# Allegro board RPI_NRF24L01.brd
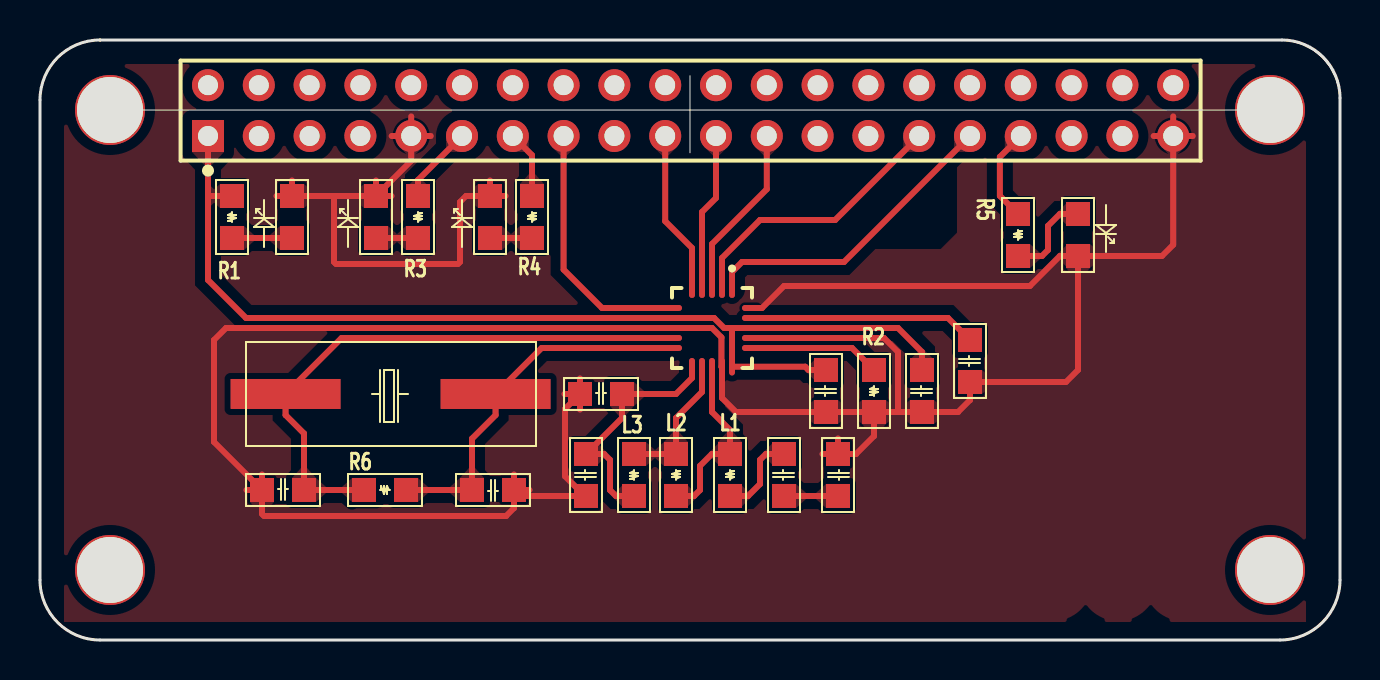
[diagram p0: board, top side]
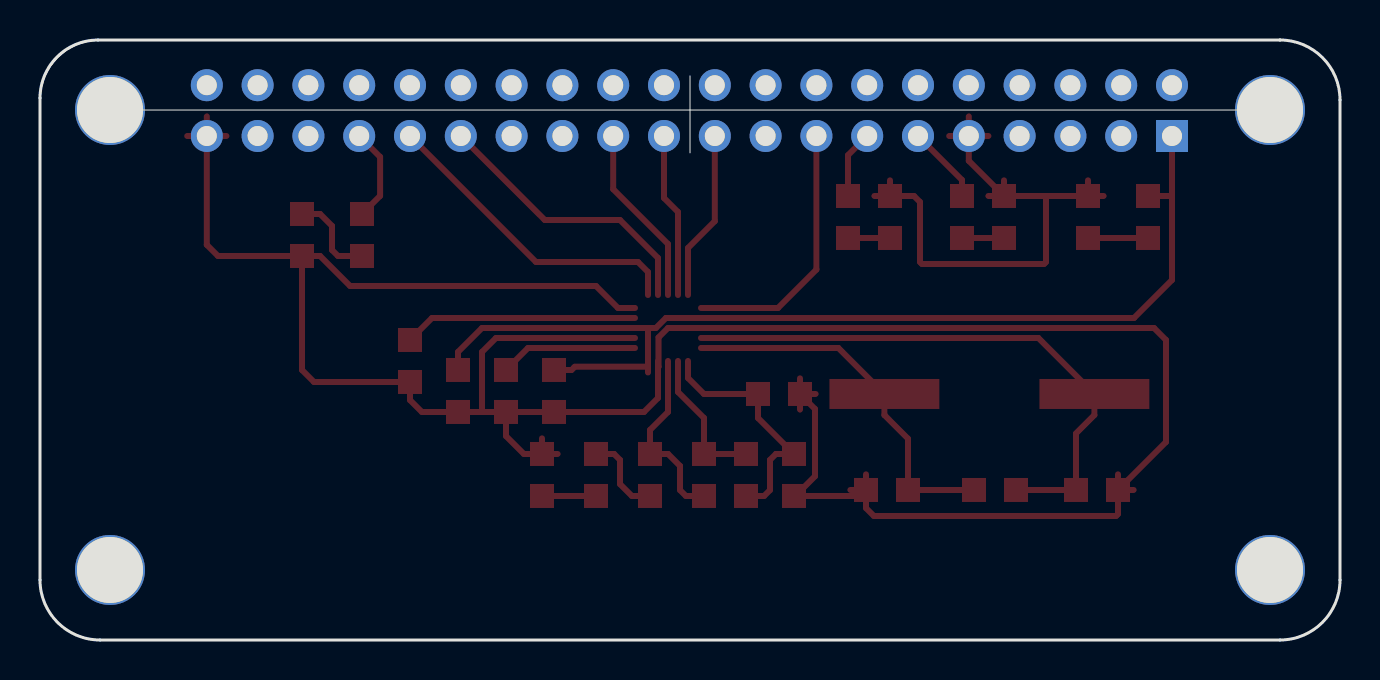
[diagram p1: board, bottom side, seen from below]

Outline 65 x 30 mm; copper layers: TOP, BOTTOM. Coordinates in mm from the lower left corner of the outline.
Outline path: 0,27 0.06,27.59 0.23,28.15 0.51,28.67 0.88,29.12 1.33,29.5 1.85,29.77 2.41,29.94 3,30 ; 0,27 arc(0.88,29.12) 3,30 ; 0,27 0,3 ; 0,27 0,3 ; 3,30 arc(3,30) 3.01,30 62.1,30 arc(64.15,29.15) 65,27.1 65,3 arc(64.12,0.88) 62,0 ; 3,30 62,30 62.58,29.94 63.15,29.77 63.66,29.49 64.12,29.12 64.49,28.67 64.77,28.15 64.94,27.59 65,27 65,3 64.94,2.41 64.77,1.85 64.49,1.33 64.12,0.88 63.66,0.51 63.15,0.23 62.58,0.06 62,0 ; 0,3 0.06,2.42 0.23,1.85 0.51,1.33 0.88,0.88 1.33,0.51 1.85,0.23 2.41,0.06 3,0 62,0 ; 0,3 arc(0.88,0.88) 3,0 62,0 ; 3.5,26.5 61.5,26.5 ; 32.5,28.21 32.5,24.36 ; 2.01,26.65 2.07,26.06 2.34,25.55 2.8,25.18 3.36,25.01 3.94,25.07 4.45,25.34 4.82,25.8 4.99,26.36 4.93,26.94 4.66,27.46 4.2,27.83 3.64,27.99 3.06,27.94 2.55,27.66 2.18,27.21 2.01,26.65 ; 2.01,3.65 2.07,3.06 2.34,2.55 2.8,2.18 3.36,2.01 3.94,2.07 4.45,2.34 4.82,2.8 4.99,3.36 4.93,3.94 4.66,4.46 4.2,4.83 3.64,4.99 3.06,4.94 2.55,4.66 2.18,4.21 2.01,3.65 ; 60.01,26.64 60.06,26.06 60.34,25.55 60.79,25.18 61.35,25.01 61.94,25.07 62.45,25.34 62.82,25.8 62.99,26.36 62.93,26.94 62.66,27.45 62.2,27.82 61.64,27.99 61.06,27.93 60.54,27.66 60.17,27.2 60.01,26.64 ; 60.01,3.64 60.06,3.06 60.34,2.55 60.79,2.18 61.35,2.01 61.94,2.07 62.45,2.34 62.82,2.8 62.99,3.36 62.93,3.94 62.66,4.45 62.2,4.82 61.64,4.99 61.06,4.93 60.54,4.66 60.17,4.2 60.01,3.64

## Design rules (mm)
constraint set DEFAULT: min track width 0.3

## Placement (name value [footprint] x y rotation side)
C1  10nF  [CAP_SMD_0805]  44.1 13.5 270 top
C2  10nF  [CAP_SMD_0805]  39.3 13.5 270 top
C3  33nF  [CAP_SMD_0805]  46.5 15 270 top
C4  1.5pF  [CAP_SMD_0805]  37.2 9.3 270 top
C5  1pF  [CAP_SMD_0805]  39.9 7.2 90 top
C6  2.2nF  [CAP_SMD_0805]  29.1 12.3 180 top
C7  4.7pF  [CAP_SMD_0805]  27.3 9.3 270 top
C8  22pF  [CAP_SMD_0805]  13.2 7.5 180 top
C9  22pF  [CAP_SMD_0805]  21.6 7.5 0 top
D1  LED  [LED_SMD_0805]  12.6 22.2 270 top
D2  LED  [LED_SMD_0805]  51.9 19.2 90 top
D3  LED  [LED_SMD_0805]  22.5 22.2 270 top
D4  LED  [LED_SMD_0805]  16.8 22.2 270 top
J1  RPI_HEADER  [J2_40_254]  8.4 25.2 0 top
L1  3.9nH  [RES_SMD_0805]  34.5 9.3 270 top
L2  8.2nH  [RES_SMD_0805]  31.8 9.3 270 top
L3  2.7nH  [RES_SMD_0805]  29.7 7.2 90 top
NOREF  -  [unnamed]  3.5 26.5 0 top
NOREF#2  -  [unnamed]  61.5 3.5 0 top
NOREF#3  -  [unnamed]  61.5 26.5 0 top
NOREF#4  -  [unnamed]  3.5 3.5 0 top
R1  330R  [RES_SMD_0805]  9.6 20.1 90 top
R2  22K  [RES_SMD_0805]  41.7 11.4 90 top
R3  330R  [RES_SMD_0805]  18.9 22.2 270 top
R4  330R  [RES_SMD_0805]  24.6 22.2 270 top
R5  330R  [RES_SMD_0805]  48.9 21.3 270 top
R6  1M  [RES_SMD_0805]  16.2 7.5 0 top
U1  nRF24L01  [QFN20_4X4]  33.6 15.6 270 top
Y1  16MHz  [CRYSTAL_HC_49]  16.2 12.3 0 top

## Library data of the parts
C1-C9 = CAPACITOR NON-POL
D1-D4 = LED
J1 = RPI_HEADER
L1-L3 = INDUCTOR
R1-R6 = R
U1 = nRF24L01
Y1 = CRYSTAL

## Footprints (pads in the part's own frame, mm; a bottom-side part is the same pattern mirrored in y, then rotated)
CAP_SMD_0805
  rect 1.2x1.2 smd: 1(0,0) 2(2.1,0)
CRYSTAL_HC_49
  rect 5.5x1.5 smd: 1(-3.92,0) 2(6.58,0)
J2_40_254
  rect 1.6x1.6 hole 1: 1(0,0)
  round 1.6 hole 1: 2(0,2.54) 3(2.54,0) 4(2.54,2.54) 5(5.08,0) 6(5.08,2.54) 7(7.62,0) 8(7.62,2.54) 9(10.16,0) 10(10.16,2.54) 11(12.7,0) 12(12.7,2.54) 13(15.24,0) 14(15.24,2.54) 15(17.78,0) 16(17.78,2.54) 17(20.32,0) 18(20.32,2.54) 19(22.86,0) 20(22.86,2.54) 21(25.4,0) 22(25.4,2.54) 23(27.94,0) 24(27.94,2.54) 25(30.48,0) 26(30.48,2.54) 27(33.02,0) 28(33.02,2.54) 29(35.56,0) 30(35.56,2.54) 31(38.1,0) 32(38.1,2.54) 33(40.64,0) 34(40.64,2.54) 35(43.18,0) 36(43.18,2.54) 37(45.72,0) 38(45.72,2.54) 39(48.26,0) 40(48.26,2.54)
LED_SMD_0805
  rect 1.2x1.2 smd: 1(0,0) 2(2.1,0)
QFN20_4X4
  oval 0.875x0.3 smd: 1(-1.938,1) 2(-1.938,0.5) 3(-1.938,0) 4(-1.938,-0.5) 5(-1.938,-1) 11(1.938,-1) 12(1.938,-0.5) 13(1.938,0) 14(1.938,0.5) 15(1.938,1)
  oval 0.3x0.875 smd: 6(-1,-1.938) 7(-0.5,-1.938) 8(0,-1.938) 9(0.5,-1.938) 10(1,-1.938) 16(1,1.938) 17(0.5,1.938) 18(0,1.938) 19(-0.5,1.938) 20(-1,1.938)
RES_SMD_0805
  rect 1.2x1.2 smd: 1(0,0) 2(2.1,0)
unnamed
  round 3.5 hole 3.3: (0,0)

## Nets
3V3: C1.1 C2.1 J1.1 R1.2 U1.7 U1.15 U1.18
GND: C1.2 C2.2 C3.2 C5.2 C6.2 C7.2 C8.2 C9.2 D1.1(CATHODE) D2.1(CATHODE) D3.1(CATHODE) D4.1(CATHODE) J1.9 J1.39 R2.1 U1.8 U1.14 U1.17 U1.20
ANTENA: C4.2 C5.1
CE: J1.31 U1.1
CSN: J1.29 U1.2
IRQ: J1.15 U1.6
LED1: J1.11 R3.1
LED2: J1.13 R4.1
LED3: J1.33 R5.1
MISO: J1.19 U1.5
MOSI: J1.21(IO9/SPI_MISO) U1.4
SCK: J1.23 U1.3
N00576: R2.2 U1.16
N00683: C3.1 U1.19
N00965: L1.1 L2.2 U1.13
N00979: L2.1 L3.2 U1.12
N01095: C4.1 L1.2
N01185: C6.1 C7.1 L3.1 U1.11
N01394: C8.1 R6.1 U1.9(XC2) Y1.1
N01401: C9.1 R6.2 U1.10 Y1.2
N02076: D2.2 R5.2
N02083: D3.2 R4.2
N02101: D4.2 R3.2
N04416: D1.2 R1.1

Pads without a net: J1 2 3 4 5 6 7 8 10 12 14 16 17 18 20 22 24 25 26 27 28 30 32 34 35 36 37 38 40

## Routing (per net, layer and track width the routed paths; a pad name or vN(x,y) marks a point on that pad's centre or on a via; arc(x,y) is an arc through that point)
3V3: length 53.2
  TOP w0.3: 34.5,15.6 34.6,15.5 U1.15 38.26,13.66 38.42,13.5 C2.1 ; 34.5,15.6 U1.18 42.9,15.6 44.1,14.4 C1.1 ; 34.5,15.6 34.2,15.6 33.7,16.1 U1.7 10.3,16.1 8.4,18 8.4,22.2 ; R1.2 8.4,22.2 ; 8.4,22.2 J1.1
GND: length 168.7
  TOP w0.3: 39.12,9.3 C5.2 ; C5.2 40.8,9.3 41.7,10.2 R2.1 ; C5.2 39.9,10.08 ; D2.1 51.9,13.5 51.3,12.9 C3.2 46.5,12 45.9,11.4 C1.2 42.9,11.4 ; D2.1 51,19.2 49.5,17.7 37.2,17.7 36.1,16.6 U1.20 ; D2.1 56.1,19.2 56.66,19.76 J1.39 ; 11.82,22.2 D1.1 ; D1.1 12.6,22.98 ; D1.1 14.7,22.2 ; D3.1 22.5,22.98 ; D3.1 23.28,22.2 ; D3.1 21.3,22.2 21,21.9 21,18.9 20.9,18.8 14.8,18.8 14.7,18.9 14.7,22.2 ; 14.7,22.2 D4.1 ; D4.1 18.56,23.96 J1.9 ; D4.1 16.8,22.98 ; D4.1 17.58,22.2 ; J1.39 57.64,25.2 ; J1.39 55.68,25.2 ; J1.39 56.66,26.18 ; U1.17 42.2,15.1 42.9,14.4 42.9,11.4 ; 26.22,12.3 C6.2 ; C6.2 26.25,11.55 26.25,8.19 27.24,7.2 ; C6.2 27,11.52 ; C6.2 27,13.08 ; J1.9 18.56,26.18 ; J1.9 19.54,25.2 ; J1.9 17.58,25.2 ; R2.1 C2.2 34.8,11.4 34.1,12.1 U1.14 34.07,13.66 34.07,15.13 33.6,15.6 U1.8 9.3,15.6 8.7,15 8.7,9.9 C8.2 ; R2.1 42.9,11.4 ; 27.24,7.2 24,7.2 C9.2 ; 27.24,7.2 C7.2 ; C9.2 24.48,7.5 ; C9.2 23.7,6.6 23.3,6.2 11.2,6.2 11.1,6.3 C8.2 ; C9.2 23.7,8.28 ; C8.2 10.32,7.5 ; C8.2 11.1,8.28
ANTENA: length 2.7
  TOP w0.3: C4.2 C5.1
CE: length 15.6
  TOP w0.3: U1.1 34.6,18.4 35.1,18.9 40.2,18.9 J1.31
CSN: length 13.9
  TOP w0.3: J1.29 39.76,21 36,21 34.1,19.1 U1.2
IRQ: length 13
  TOP w0.3: J1.15 26.18,18.52 28.1,16.6 U1.6
LED1: length 3.9
  TOP w0.3: R3.1 18.9,23 J1.11
LED2: length 3.4
  TOP w0.3: J1.13 24.6,24.24 R4.1
LED3: length 4.7
  TOP w0.3: R5.1 48,22.21 48,24.16 J1.33
MISO: length 8.2
  TOP w0.3: J1.19 31.26,20.94 32.6,19.6 U1.5
MOSI: length 8
  TOP w0.3: J1.21 33.8,22.1 33.1,21.4 U1.4
SCK: length 8.8
  TOP w0.3: J1.23 36.34,22.54 33.6,19.8 U1.3
N00576: length 6.6
  TOP w0.3: R2.2 40.6,14.6 U1.16
N00683: length 11.4
  TOP w0.3: C3.1 45.4,16.1 U1.19
N00965: length 9
  TOP w0.3: L2.2 32.7,7.2 33,7.5 33,8.71 33.6,9.3 L1.1 34.5,10.5 33.6,11.4 U1.13
N00979: length 7
  TOP w0.3: L3.2 L2.1 31.8,11.1 33.1,12.4 U1.12
N01095: length 4.3
  TOP w0.3: C4.1 36.3,9.3 36,9.01 36,7.8 35.4,7.2 L1.2
N01185: length 12.3
  TOP w0.3: L3.1 28.8,7.2 28.5,7.5 28.5,9.01 28.2,9.3 C7.1 29.1,11.1 C6.1 31.8,12.3 32.6,13.1 U1.11
N01394: length 28.7
  TOP w0.3: R6.1 C8.1 13.2,10.33 12.28,11.25 Y1.1 15.08,15.1 U1.9
N01401: length 18.4
  TOP w0.3: R6.2 C9.1 21.6,10.07 22.78,11.25 Y1.2 25.08,14.6 U1.10
N02076: length 4.6
  TOP w0.3: D2.2 51,21.3 50.4,20.71 50.4,19.5 50.1,19.2 R5.2
N02083: length 2.1
  TOP w0.3: D3.2 R4.2
N02101: length 2.1
  TOP w0.3: D4.2 R3.2
N04416: length 3
  TOP w0.3: R1.1 D1.2

## Copper pours and planes (outline as drawn; the poured copper is in the pictures)
GND on TOP: 1.2,28.8 1.2,0.9 63.3,0.9 63.3,28.8 ; 28 cut-outs

Small or netless copper shapes (teardrops, artwork), in the pictures only: 61 on TOP
